# Altium PCB Apollo_Main_Board_1 8.PcbDoc (part 1 of 4)
Units mil, origin at the board's own origin, x right, y up, seen from the top; angles counter-clockwise.
Board outline 984.25 x 629.92 mil, 6 copper layers (Top, Inner Layer 2, Inner Layer 3, Inner Layer 4, Inner Layer 5, Bottom), stack 5.16 mil thick; 125 components, 112 nets, 514 pads, 2007 vias.
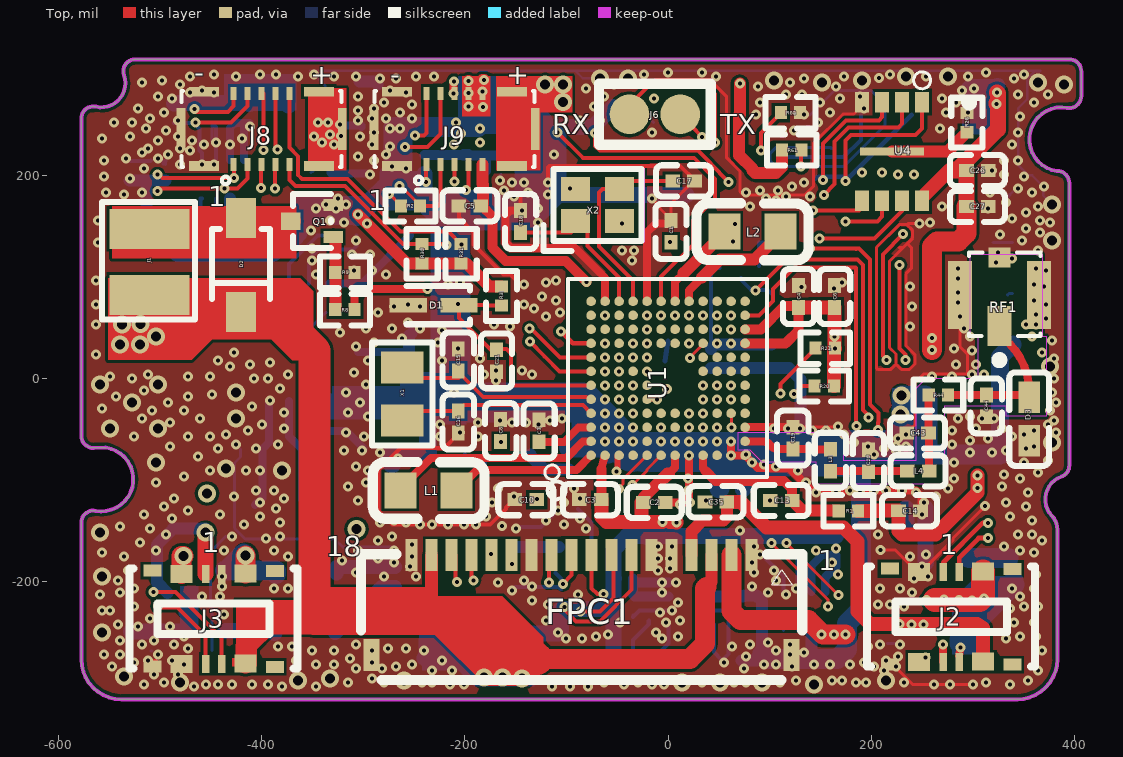
[diagram p0: Top view]
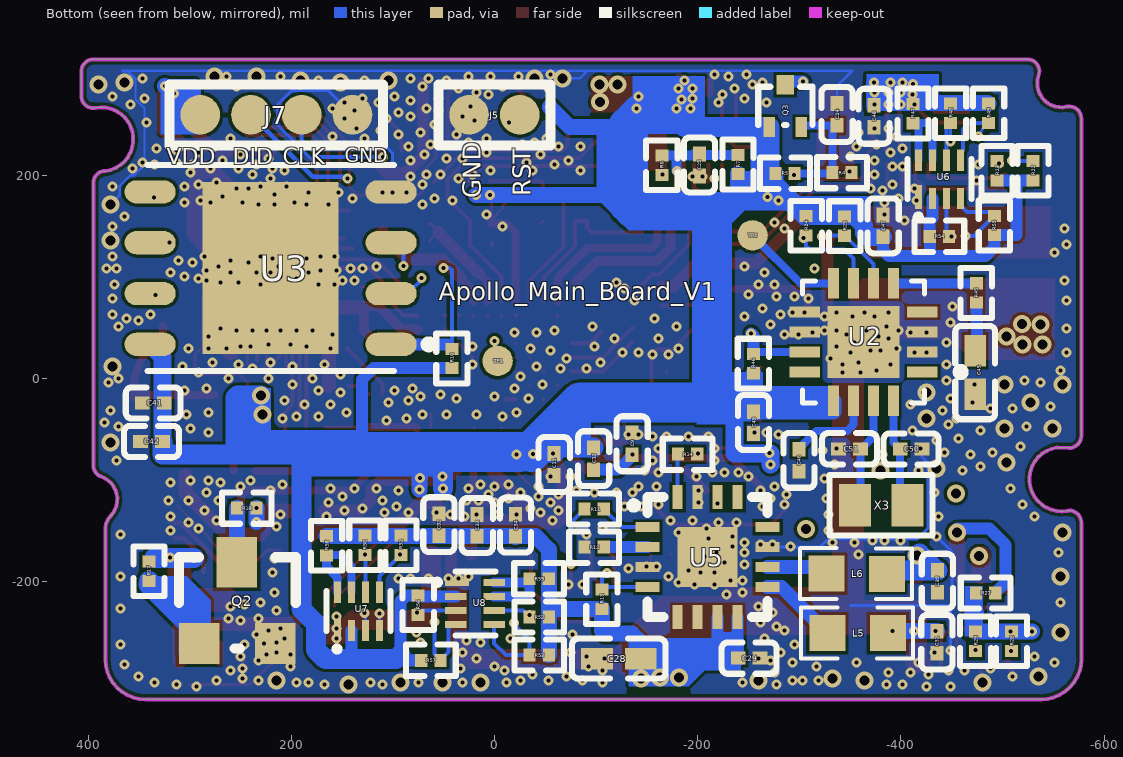
[diagram p1: Bottom view, seen from below]
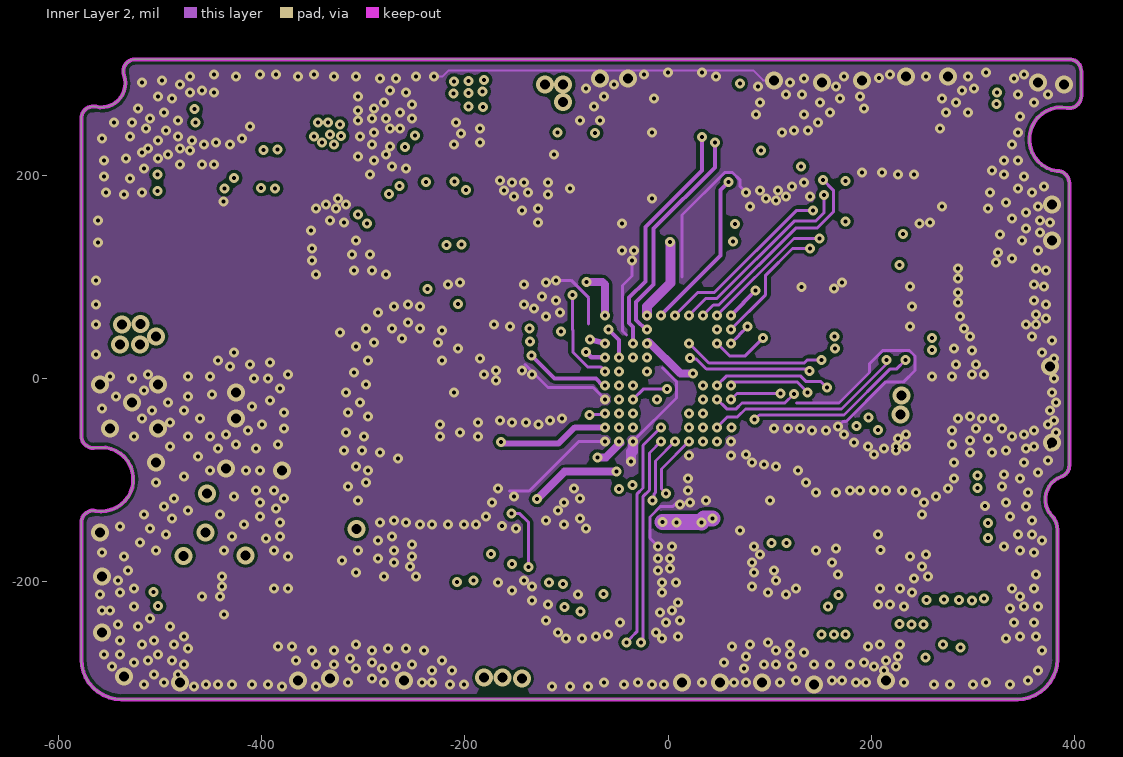
[diagram p2: Inner Layer 2]
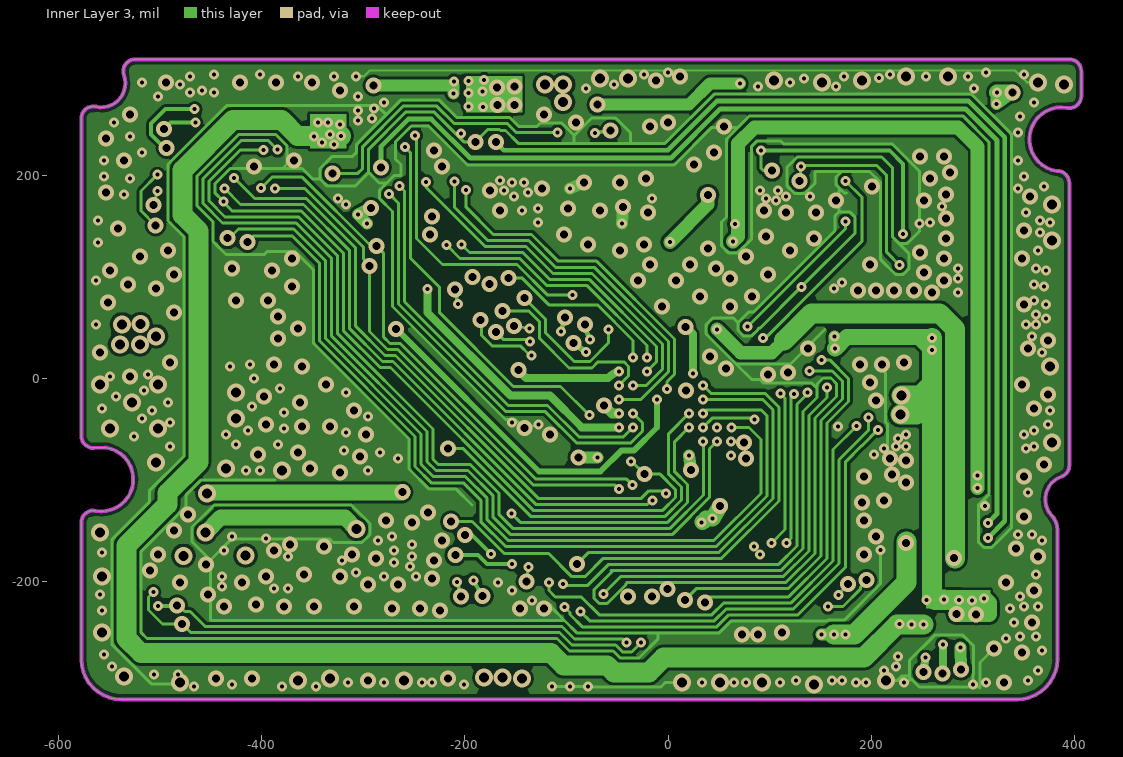
[diagram p3: Inner Layer 3]
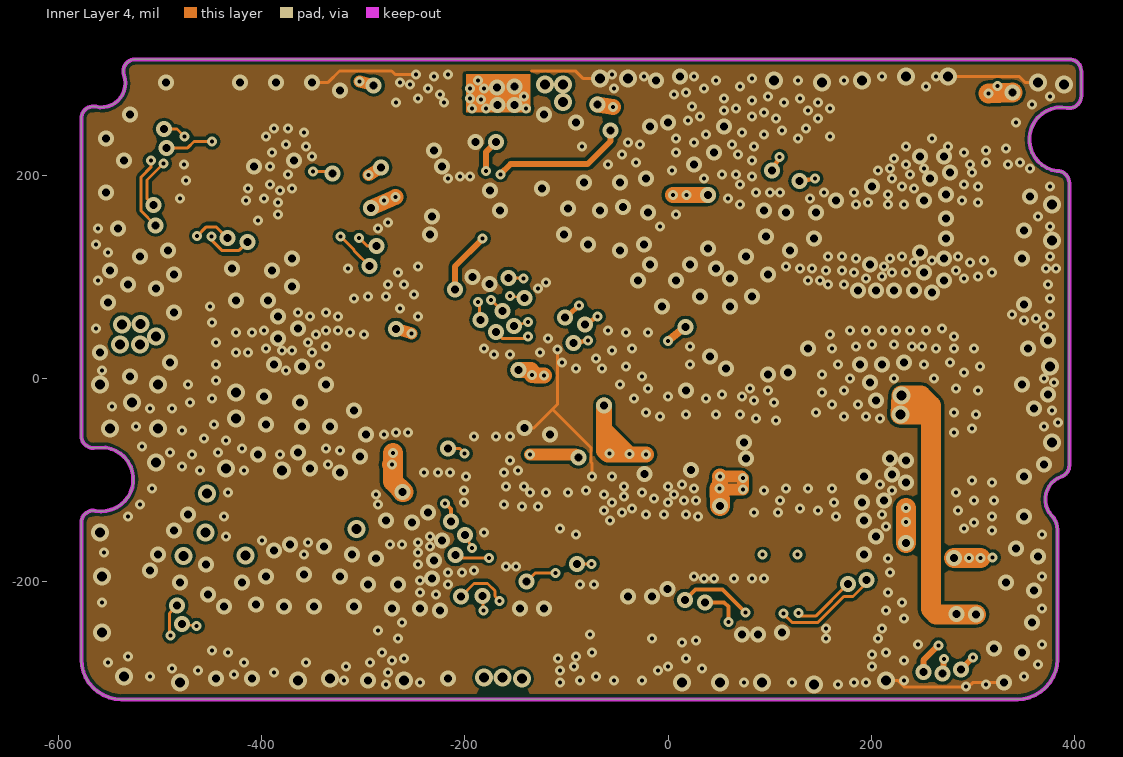
[diagram p4: Inner Layer 4]
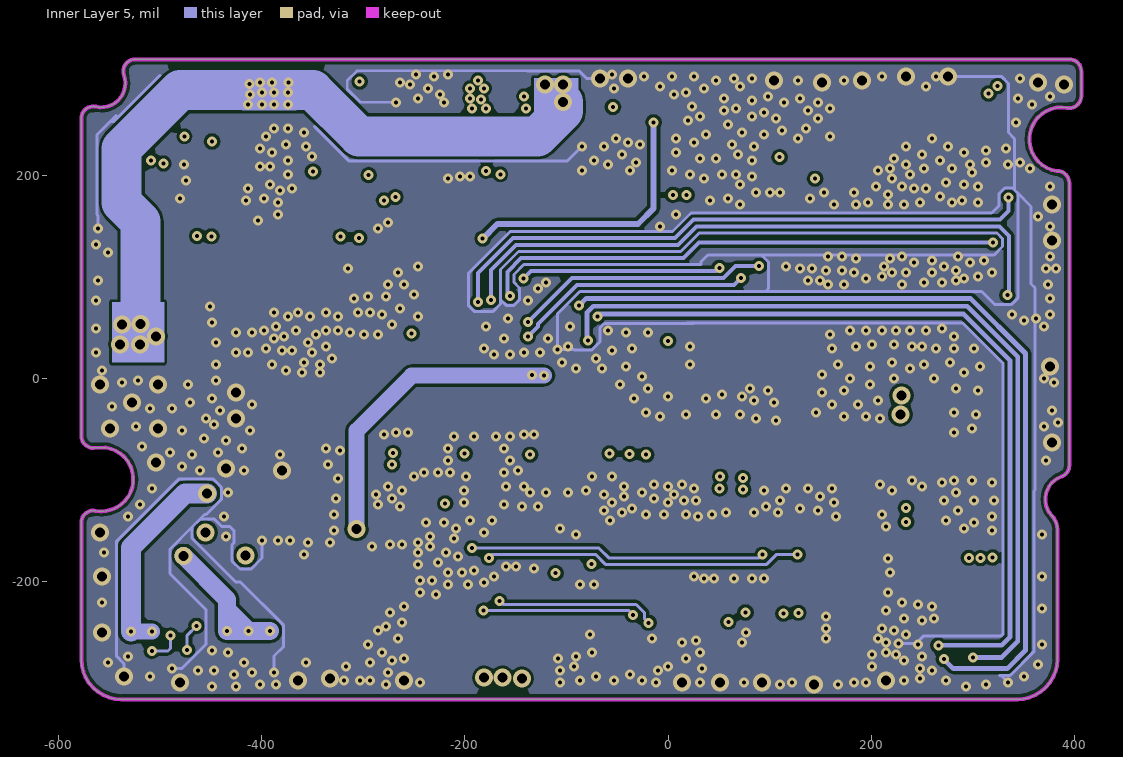
[diagram p5: Inner Layer 5]

## Layer stack, top to bottom
Solder Mask Top: solder mask 0.4, Solder Resist, Dk 3.5
Top: signal copper 1.38
Inner Layer 2: signal copper 0.6
Inner Layer 3: signal copper 0.6
Inner Layer 4: signal copper 0.6
Inner Layer 5: signal copper 0.6
Bottom: signal copper 1.38
Solder Mask Bottom: solder mask 0.4, Solder Resist, Dk 3.5

## Board outline
383.08,-276.6 383.08,-148.84 ccw(c363.4,-148.84) 377.72,-135.34 377.7,-135.32 cw(c394.89,-119.12) 387.05,-96.84 387.02,-96.85 ccw(c383.08,-85.71) 394.89,-85.71 394.89,192.2 ccw(c383.08,192.2) 382.79,204 382.74,204.01 cw(c387.02,235.21) 392.76,266.18 392.74,266.18 ccw(c394.89,277.8) 406.7,277.8 406.7,302.14 ccw(c394.89,302.14) 394.89,313.95 -524.46,313.95 ccw(c-524.46,302.14) -535.59,298.2 -535.6,298.21 cw(c-557.86,290.33) -563.1,267.29 -563.12,267.3 ccw(c-565.73,255.78) -577.55,255.78 -577.55,-56.7 ccw(c-565.74,-56.7) -565.47,-68.51 -553.59,-68.23 cw(c-557.86,-99.44) -563.6,-130.4 -563.58,-130.41 ccw(c-565.73,-142.02) -577.55,-142.02 -577.55,-276.6 ccw(c-538.18,-276.6) -538.18,-315.97 343.71,-315.97 ccw(c343.71,-276.6)

## Design rules (kind name [scope] priority, off if disabled: settings)
Clearance "Clearance - Default - DEFAULT- SMD" [IsVia vs IsSMTPin] p1: gap=0 ignorepadtopadclearanceinfootprint=FALSE
Clearance "Clearance - Default - DEFAULT - Via" [IsVia vs IsVia] p2: gap=0 ignorepadtopadclearanceinfootprint=FALSE
Clearance "Clearance - Default - DEFAULT - Net" [All] p3: gap=2.95 ignorepadtopadclearanceinfootprint=FALSE except(0: Arc-Hole Track-Hole SMDPad-Hole THPad-Hole Via-Hole Fill-Hole Poly-Hole Region-Hole Text-Hole; 10: Text-Text)
ComponentClearance "ComponentClearance - Default - DEFAULT" [All] p1: gap=0 collisioncheckmode=3 verticalgap=10 showdistances=FALSE
FanoutControl Fanout_Small [(CompPinCount < 5)] p3: bgadir=Out bgaviamode=Centered fanoutstyle=Auto fanoutdirection=OutThenIn viagrid=1 // Fanout_Small (Default Rule)
FanoutControl Fanout_SOIC [IsSOIC] p4: bgadir=Out bgaviamode=Centered fanoutstyle=Auto fanoutdirection=Alternating viagrid=1 // Fanout_SOIC (Default Rule)
HoleToHoleClearance "HoleToHoleClearance - Default - DEFAULT" [All] p1: gap=0 allowstackedmicrovias=TRUE
Length "Default Length" [All] p1: maxlimit=50000 minlimit=0
MaxMinImpedance "Default Impedance" [All] p1: minimum=50.00 maximum=150.0
ParallelSegment "Default Parallel Segment Same Layer" [All] p1: limit=1000 gap=200
ParallelSegment "Default Parallel Segment Adjasent" [All] p2: limit=1000 gap=200
PlaneConnect "Default PlaneConnect" [All] p1: planeconnectstyle=Direct reliefexpansion=20 reliefentries=4 reliefconductorwidth=2.95 reliefairgap=10
PolygonConnect "PolygonConnect - Default SMT" [IsSMTPin] p1: connectstyle=Direct reliefconductorwidth=10 reliefentries=4 polygonreliefangle="45 Angle" airgapwidth=10
PolygonConnect "PolygonConnect - Default Pad" [All] p2: connectstyle=Direct reliefconductorwidth=2.95 reliefentries=4 polygonreliefangle="45 Angle" airgapwidth=10
RoutingLayers "RoutingLayers - Default - DEFAULT" [All] p1: top layer_v5=TRUE mid layer 1_v5=TRUE mid layer 2_v5=TRUE mid layer 3_v5=TRUE mid layer 4_v5=TRUE bottom layer_v5=TRUE
RoutingPriority "RoutingPriority - Default - DEFAULT" [All] p1: routingpriority=0
RoutingTopology "Default Routing Topology" [All] p1: topology=Shortest
RoutingVias "RoutingVias - Default - DEFAULT" [All] p1: holewidth=3.94 width=9.84 viastyle="Through Hole" minholewidth=3.94 minwidth=9.84 maxholewidth=3.94 maxwidth=9.84
SMDToCorner "SMDToCorner - Default - DEFAULT" [All] p1: distance=0
SolderMaskExpansion [All] p1: expansion=4 istentingtop=FALSE
Width "Default Width" [All] p1: maxlimit=118.11 minlimit=2.95 preferedwidth=2.95
22 further rules are at their usual default settings.

## Components (designator, comment, footprint, x,y, rotation, side; value= is the part's Value field where it differs from the comment)
C1 "C0201" C0201 2.86,144.59 r270 top
C2 "C0201" C0201 -13.63,-122.16 r180 top
C3 "C0201" C0201 -76.55,-119.51 r0 top
C4 "C0201" C0201 128.44,80.43 r270 top
C5 "C0201" C0201 -195.17,169.73 r0 top
C6 "C0201" C0201 163.88,80.43 r270 top
C7 "C0201" C0201 -126.95,-51.68 r270 top
C8 "C0201" C0201 -164.76,-51.39 r270 top
C9 "C0201" C0201 -135.47,-64.42 r270 bottom
C10 "C0201" C0201 -140.1,-119.44 r0 top
C11 "C0201" C0201 -58.7,-84.87 r90 bottom
C12 "C0201" C0201 -97.57,-79.13 r270 bottom
C13 "C0201" C0201 111.31,-120.3 r180 top
C14 "C0201" C0201 237.57,-130.36 r0 top
C15 "C0201" C0201 -206.55,17.95 r90 top
C16 "C0201" C0201 -206.55,-43.07 r270 top
C17 "C0201" C0201 15.25,194.32 r180 top
C18 "C0201" C0201 -145.14,154.37 r90 top
C19 "C0201" C0201 122.75,-58.89 r90 top
C20 "C0201" C0201 197.15,-81.08 r90 top
C21 "C0201" C0201 -168.93,17.21 r270 top
C24 "C0201" C0201 -337.17,259.73 r90 bottom
C25 "C0201" C0201 -201.62,210.01 r270 bottom
C26 "C0201" C0201 304.37,204.58 r0 top
C27 "C0201" C0201 304.37,169.15 r0 top
C28 "C0402" C0402 -170.28,-250.92 r0 bottom
C29 "C0201" C0201 -250.59,-275.41 r180 bottom
C30 "C0201" C0201 -435.92,-199.77 r90 bottom
C31 "C0201" C0201 -435.4,-259.75 r90 bottom
C32 "C0201" C0201 54.78,-144.11 r90 bottom
C33 "C0201" C0201 17.05,-144.8 r90 bottom
C34 "C0201" C0201 -20.69,-144.57 r90 bottom
C35 "C0201" C0201 46.99,-121.58 r180 top
C41 "C0201" C0201 335.95,-24.26 r0 bottom
C42 "C0201" C0201 337.57,-62.22 r0 bottom
C43 "C0201" C0201 245.57,-53.87 r180 top
C44 "C0201" C0201 313.18,-27.16 r270 top
C45 "C0402" C0402 -448.1,53.63 r270 bottom
C46 "C0201" C0201 -299.6,-80.71 r270 bottom
C47 "C0201" C0201 -382.52,150.03 r270 bottom
C48 "C0201" C0201 -373.47,257.93 r90 bottom
C49 "C0201" C0201 -254.94,-43.6 r270 bottom
C50 "C0201" C0201 -410.05,-69.61 r180 bottom
C51 "C0201" C0201 -349.37,-69.4 r0 bottom
D1 "SOD-523_L1.2-W0.8-LS1.6-RD" SOD-523_L1.2-W0.8-LS1.6-RD -182.52,48.71 r180 top
D2 "SOD-323_L1.8-W1.3-LS2.5-RD" SOD-323_L1.8-W1.3-LS2.5-RD -387.29,45.21 r90 top
D3 "0402" 0402 380.4,-88.1 r90 top
FPC1 "FPC-SMD_18P-P0.50_HDGC_0.5K-HX-18PWB" FPC-SMD_18P-P0.50_HDGC_0.5K-HX-18PWB -317.35,-306.96 r0 top
J1 "MOTOR_PAD" MOTOR_PAD -559.37,56.27 r0 top
J2 "CONN-SMD_4P-P0.40_5050040812" CONN-SMD_4P-P0.40_5050040812 191.93,-288.56 r0 top
J3 "CONN-SMD_4P-P0.40_5050040812" CONN-SMD_4P-P0.40_5050040812 -534.07,-290.56 r0 top
J5 "2PIN_1.27MM" 2PIN_1.27MM -24.93,259.26 r0 bottom
J6 "2PIN_1.27MM" 2PIN_1.27MM 11.98,259.85 r180 top
J7 "4PIN_1.27MM" 4PIN_1.27MM 139.75,259.26 r0 bottom
J8 "CONN-SMD_BK13C06-10DS-2-0.35V-800" CONN-SMD_BK13C06-10DS-2-0.35V-800 -480.59,285.04 r270 top
J9 "CONN-SMD_BK13C06-10DS-2-0.35V-800" CONN-SMD_BK13C06-10DS-2-0.35V-800 -290.59,285.04 r270 top
L1 "C0603" C0603 -235.92,-110.34 r180 top
L2 "C0603" C0603 82.83,144.28 r180 top
L3 "C0201" C0201 159.75,-80.68 r90 top
L4 "C0201" C0201 246.13,-91.11 r180 top
L5 "0603A" 0603A -354.72,-248.51 r90 bottom
L6 "0603A" 0603A -353.59,-190.09 r90 bottom
Q1 "SOT-723_L1.2-W0.8-P0.40-LS1.2-BR" SOT-723_L1.2-W0.8-P0.40-LS1.2-BR -379.48,123.07 r0 top
Q2 "SOT-23" SOT-23 295.61,-261.71 r180 bottom
Q3 "SOT-723_L1.2-W0.8-P0.40-LS1.2-BR" SOT-723_L1.2-W0.8-P0.40-LS1.2-BR -254.49,297.13 r270 bottom
R1 "RES0201" RES0201 149.97,-113.82 r0 top
R2 "RES0201" RES0201 -226.08,153.02 r180 top
R3 "RES0201" RES0201 -180.67,53.53 r90 top
R4 "RES0201" RES0201 -369.46,185.84 r0 bottom
R5 "RES0201" RES0201 -258.43,218.39 r180 bottom
R6 "RES0201" RES0201 -148.03,182.28 r90 bottom
R7 "RES0201" RES0201 -223,182.95 r90 bottom
R8 "RES0201" RES0201 -345.52,84.14 r0 top
R9 "RES0201" RES0201 -345.53,120.94 r0 top
R10 "RES0201" RES0201 25.41,46.98 r270 bottom
R11 "RES0201" RES0201 -125.44,-145.33 r0 bottom
R12 "RES0201" RES0201 -125.44,-182.85 r0 bottom
R13 "RES0201" RES0201 -122.26,-189.96 r270 bottom
R14 "RES0201" RES0201 -217.54,-91.32 r0 bottom
R17 "RES0201" RES0201 323.53,-162.41 r270 bottom
R18 "RES0201" RES0201 271.39,-111.2 r180 bottom
R20 "RES0201" RES0201 126.14,9.01 r0 top
R21 "RES0201" RES0201 127.14,46.26 r0 top
R22 "RES0201" RES0201 -546.66,231.81 r270 bottom
R23 "RES0201" RES0201 -511.22,231.81 r270 bottom
R24 "RES0201" RES0201 -290.12,122.68 r90 bottom
R25 "RES0201" RES0201 -328.01,122.33 r90 bottom
R26 "RES0201" RES0201 310.66,279.14 r270 top
R27 "RES0201" RES0201 -455.87,-194.64 r180 bottom
R28 "RES0201" RES0201 -492.21,-286.33 r90 bottom
R29 "RES0201" RES0201 -456.78,-286.33 r90 bottom
R30 "RES0201" RES0201 -225.52,150.09 r270 top
R31 "RES0201" RES0201 -187.06,150.09 r270 top
R44 "RES0201" RES0201 293.48,-33.11 r180 top
R45 "RES0201" RES0201 -490.8,111.48 r270 bottom
R46 "RES0201" RES0201 -271.42,41.94 r270 bottom
R47 "RES0201" RES0201 -395.22,233.11 r90 bottom
R48 "RES0201" RES0201 -465.5,288.27 r270 bottom
R49 "RES0201" RES0201 -502.9,288.27 r270 bottom
R50 "RES0201" RES0201 110.96,-136.84 r270 bottom
R51 "RES0201" RES0201 75.53,-136.84 r270 bottom
R52 "RES0201" RES0201 -71.55,-251.54 r0 bottom
R53 "RES0201" RES0201 -71.55,-288.94 r0 bottom
R54 "RES0201" RES0201 -410.38,156.38 r180 bottom
R55 "RES0201" RES0201 -475.34,122.92 r90 bottom
R56 "RES0201" RES0201 58.51,-195.81 r270 bottom
R57 "RES0201" RES0201 90.13,-260.96 r180 bottom
R58 "RES0201" RES0201 181.87,-192.25 r90 bottom
R59 "RES0201" RES0201 -16.43,-180.67 r180 bottom
R60 "RES0201" RES0201 93.01,278.06 r0 top
R61 "RES0201" RES0201 94.16,241.26 r0 top
RF1 "IPEX-SMD_4P-L1.8-W1.7-LS2.0" IPEX-SMD_4P-L1.8-W1.7-LS2.0 270.56,8.97 r0 top
TP1 "TESTPOINT" TESTPOINT -3.04,17.08 r90 bottom
TP2 "TESTPOINT" TESTPOINT -253.95,140.65 r90 bottom
U1 "BGA131_0P35_4P7X4P7_AP4BL" BGA131_0P35_4P7X4P7_AP4BL 0,0 r90 top
U2 "QFN50P300X300X90-17N" QFN50P300X300X90-17N -363.17,35.65 r0 bottom
U3 "WSON-8_L6.0-W5.0-P1.27-BL-EP" WSON-8_L6.0-W5.0-P1.27-BL-EP 220.35,108.43 r90 bottom
U4 "PSON50P200X300X50-9N" PSON50P200X300X50-9N 220.51,223.2 r270 top
U5 "TQFN-16_L3.0-W3.0-P0.50-BL-EP1.5" TQFN-16_L3.0-W3.0-P0.50-BL-EP1.5 -135.4,-125.2 r270 bottom
U6 "X2SON-8_L1.4-W1.0-P0.35-BL" X2SON-8_L1.4-W1.0-P0.35-BL -437.94,195.75 r180 bottom
U7 "X2SON-8_L1.4-W1.0-P0.35-BL" X2SON-8_L1.4-W1.0-P0.35-BL 134.09,-229.45 r180 bottom
U8 "X2SON-8_L1.4-W1.0-P0.35-BL" X2SON-8_L1.4-W1.0-P0.35-BL 19.26,-221.59 r270 bottom
X1 "OSC-SMD_2P-L1.6-W1.0" OSC-SMD_2P-L1.6-W1.0 -261.67,-15.51 r270 top
X2 "CRYSTAL-SMD_4P-L1.6-W1.2-BL" CRYSTAL-SMD_4P-L1.6-W1.2-BL -69.36,170.53 r0 top
X3 "OSC-SMD_2P-L1.6-W1.0" OSC-SMD_2P-L1.6-W1.0 -380.53,-124.85 r180 bottom

## Footprints (in the part's own frame and the unit in brackets; to place one, negate y for a bottom-side part, rotate by r counter-clockwise, add the part's x,y. Pads: shape width x height; smd on the part's side, far side on the other; paste and mask are expansions set on the pad)
2PIN_1.27MM [mil]
  round 39 smd: 1(0,0) 2(50,0)
  silkscreen extent -30,-30 80,30
4PIN_1.27MM [mil]
  round 39 smd: 1(0,0) 2(50,0) 3(100,0) 4(150,0)
  silkscreen extent -30,-30 180,30
0402 [mm]
  rect 0.79x0.54 smd: 1(0.674,0.635) 2(1.764,0.635)
  silkscreen extent 0.05,0.14 2.39,1.13
0603A [mm]
  rect 0.9x0.9 smd: 1(-0.058,0.688) 2(-0.058,-0.826)
  silkscreen extent -0.69,-1.46 0.58,1.34
BGA131_0P35_4P7X4P7_AP4BL [mm]
  round 0.24 smd: A1(-1.925,1.925) A2(-1.575,1.925) A3(-1.225,1.925) A4(-0.875,1.925) A5(-0.525,1.925) A6(-0.175,1.925) A7(0.175,1.925) A8(0.525,1.925) A9(0.875,1.925) A10(1.225,1.925) A11(1.575,1.925) A12(1.925,1.925) B1(-1.925,1.575) B2(-1.575,1.575) B3(-1.225,1.575) B4(-0.875,1.575) B5(-0.525,1.575) B6(-0.175,1.575) B7(0.175,1.575) B8(0.525,1.575) B9(0.875,1.575) B10(1.225,1.575) B11(1.575,1.575) B12(1.925,1.575) C1(-1.925,1.225) C2(-1.575,1.225) C3(-1.225,1.225) C4(-0.875,1.225) C5(-0.525,1.225) C6(-0.175,1.225) C7(0.175,1.225) C8(0.525,1.225) C9(0.875,1.225) C10(1.225,1.225) C11(1.575,1.225) C12(1.925,1.225) D1(-1.925,0.875) D2(-1.575,0.875) D3(-1.225,0.875) D4(-0.875,0.875) D5(-0.525,0.875) D6(-0.175,0.875) D7(0.175,0.875) D8(0.525,0.875) D9(0.875,0.875) D10(1.225,0.875) D11(1.575,0.875) D12(1.925,0.875) E1(-1.925,0.525) E2(-1.575,0.525) E3(-1.225,0.525) E4(-0.875,0.525) E5(-0.525,0.525) E6(-0.175,0.525) E7(0.175,0.525) E8(0.525,0.525) E9(0.875,0.525) E10(1.225,0.525) E11(1.575,0.525) E12(1.925,0.525) F1(-1.925,0.175) F2(-1.575,0.175) F3(-1.225,0.175) F4(-0.875,0.175) F9(0.875,0.175) F10(1.225,0.175) F11(1.575,0.175) F12(1.925,0.175) G1(-1.925,-0.175) G2(-1.575,-0.175) G3(-1.225,-0.175) G4(-0.875,-0.175) G9(0.875,-0.175) G10(1.225,-0.175) G11(1.575,-0.175) G12(1.925,-0.175) H1(-1.925,-0.525) H2(-1.575,-0.525) H3(-1.225,-0.525) H4(-0.875,-0.525) H9(0.875,-0.525) H10(1.225,-0.525) H11(1.575,-0.525) H12(1.925,-0.525) J1(-1.925,-0.875) J2(-1.575,-0.875) J3(-1.225,-0.875) J4(-0.875,-0.875) J5(-0.525,-0.875) J6(-0.175,-0.875) J7(0.175,-0.875) J8(0.525,-0.875) J9(0.875,-0.875) J10(1.225,-0.875) J11(1.575,-0.875) J12(1.925,-0.875) K1(-1.925,-1.225) K2(-1.575,-1.225) K3(-1.225,-1.225) K4(-0.875,-1.225) K5(-0.525,-1.225) K6(-0.175,-1.225) K7(0.175,-1.225) K8(0.525,-1.225) K9(0.875,-1.225) K10(1.225,-1.225) K11(1.575,-1.225) K12(1.925,-1.225) L1(-1.925,-1.575) L2(-1.575,-1.575) L4(-0.875,-1.575) L5(-0.525,-1.575) L6(-0.175,-1.575) L7(0.175,-1.575) L8(0.525,-1.575) L9(0.875,-1.575) L10(1.225,-1.575) L11(1.575,-1.575) L12(1.925,-1.575) M1(-1.925,-1.925) M2(-1.575,-1.925) M3(-1.225,-1.925) M4(-0.875,-1.925) M5(-0.525,-1.925) M6(-0.175,-1.925) M7(0.175,-1.925) M8(0.525,-1.925) M9(0.875,-1.925) M10(1.225,-1.925) M11(1.575,-1.925) M12(1.925,-1.925)
  silkscreen extent -3.03,-2.47 2.49,3.01
C0201 [mil]
  rect 14.51x12.76 smd paste-6.75 mask+2: 1(-10.8,0) 2(10.8,0)
  silkscreen extent -27,-15 27,15
C0402 [mm]
  rect 0.79x0.54 smd: 1(0.674,0.635) 2(1.764,0.635)
  silkscreen extent 0.05,0.14 2.39,1.13
C0603 [mm]
  rect 0.8x0.9 smd: 1(-0.7,0) 2(0.7,0)
  silkscreen extent -1.41,-0.71 1.39,0.72
CONN-SMD_4P-P0.40_5050040812 [mm]
  rect 0.45x0.3 smd mask+0.05: 0(0.672,0.17) 0_1(0.672,2.572) 0_2(3.732,2.565) 0_3(3.732,0.168)
  rect 0.19x0.45 smd mask+0.05: 1(2.002,2.484) 2(2.402,2.485) 3(2.002,0.24) 4(2.402,0.238)
  rect 0.55x0.45 smd mask+0.05: 5(1.402,2.492) 6(3.002,2.497) 7(1.402,0.24) 8(3.002,0.248)
  silkscreen extent 0.1,0.12 4.3,2.62
CONN-SMD_BK13C06-10DS-2-0.35V-800 [mm]
  rect 0.325x0.15 smd mask+0.051: 1(1.89,1.344) 2(1.89,1.694) 3(1.89,2.044) 4(1.89,2.394) 5(1.89,2.744) 6(0.116,2.744) 7(0.116,2.394) 8(0.116,2.044) 9(0.116,1.694) 10(0.116,1.344)
  rect 0.24x0.75 smd mask+0.051: 11(0.074,0.609) 12(1.933,0.609) 13(1.933,3.479) 14(0.074,3.479)
  rect 1.04x0.215 smd mask+0.051: 15(1.007,0.029) 16(1.007,4.059)
  silkscreen extent 0.05,0.04 2.39,4.04
CRYSTAL-SMD_4P-L1.6-W1.2-BL [mm]
  rect 0.73x0.6 smd mask+0.05: 1(-0.55,-0.4) 2(0.55,-0.4) 3(0.55,0.4) 4(-0.55,0.4)
  silkscreen extent -1.35,-1.15 1.1,0.9
FPC-SMD_18P-P0.50_HDGC_0.5K-HX-18PWB [mm]
  rect 0.3x0.8 smd mask+0.05: 1(10.148,3.377) 2(9.648,3.377) 3(9.148,3.377) 4(8.648,3.377) 5(8.148,3.377) 6(7.648,3.377) 7(7.148,3.377) 8(6.648,3.377) 9(6.148,3.377) 10(5.648,3.377) 11(5.148,3.377) 12(4.648,3.377) 13(4.148,3.377) 14(3.648,3.377) 15(3.148,3.377) 16(2.648,3.377) 17(2.148,3.377) 18(1.648,3.377)
  rect 0.4x0.8 smd mask+0.05: 19(0.648,0.877) 20(11.148,0.877)
  silkscreen extent 0.38,0.25 11.41,3.4
IPEX-SMD_4P-L1.8-W1.7-LS2.0 [mm]
  rect 0.6x1 smd mask+0.05: 1(1.417,1.085)
  rect 0.6x1.7 smd mask+0.05: 2(2.406,1.86) 4(0.427,1.86)
  rect 0.55x0.5 smd mask+0.05: 3(1.417,2.789)
  silkscreen extent 0.65,0.13 2.43,2.92
MOTOR_PAD [mm]
  rect 2x1 smd mask+0.05: 1(1.237,0.655) 2(1.238,2.305)
  silkscreen extent 0.06,0.04 2.38,2.98
OSC-SMD_2P-L1.6-W1.0 [mm]
  rect 0.8x1.06 smd: 1(-0.66,0) 2(0.66,0)
  silkscreen extent -1.29,-0.76 1.29,0.76
PSON50P200X300X50-9N [mm]
  rect 0.52x0.35 smd: 1(-1.23,0.75) 2(-1.23,0.25) 3(-1.23,-0.25) 4(-1.23,-0.75) 5(1.23,-0.75) 6(1.23,-0.25) 7(1.23,0.25) 8(1.23,0.75)
  rect 0.2x1.6 smd: 9(0,0)
  silkscreen extent -1.33,1.83 -1.13,2.02
QFN50P300X300X90-17N [mm]
  rect 0.76x0.27 smd: 1(-1.47,0.75) 2(-1.47,0.25) 3(-1.47,-0.25) 4(-1.47,-0.75) 9(1.47,-0.75) 10(1.47,-0.25) 11(1.47,0.25) 12(1.47,0.75)
  rect 0.27x0.76 smd: 5(-0.75,-1.47) 6(-0.25,-1.47) 7(0.25,-1.47) 8(0.75,-1.47) 13(0.75,1.47) 14(0.25,1.47) 15(-0.25,1.47) 16(-0.75,1.47)
  rect 1.8x1.8 smd paste-0.33: 17(0,0)
  silkscreen extent -2.53,-1.53 1.53,1.53
RES0201 [mil]
  rect 11.93x12.76 smd paste-5.88 mask+2: 1(17.97,-16.62) 2(36.99,-16.62)
  silkscreen extent 3,-32 52,-1
SOD-323_L1.8-W1.3-LS2.5-RD [mm]
  rect 1x0.75 smd mask+0.051: 1(0.513,0.841) 2(2.858,0.841)
  silkscreen extent 0.83,0.11 2.59,1.57
SOD-523_L1.2-W0.8-LS1.6-RD [mm]
  rect 0.93x0.36 smd mask+0.051: 1(0.592,-0.591) 2(1.862,-0.591)
  silkscreen extent 0.31,-1.07 1.9,-0.11
SOT-23 [mil]
  rect 40x40 smd: 1(4.88,0.63) 2(79.88,0.63)
  rect 40x50 smd: 3(41.88,80.63)
  silkscreen extent -15,-4 100,86
SOT-723_L1.2-W0.8-P0.40-LS1.2-BR [mil]
  rect 19.25x11.57 smd mask+2: 1(49.78,15.92) 2(49.78,47.41)
  rect 19.25x17.09 smd mask+2: 3(8.08,31.66)
  silkscreen extent 10,5 48,58
TESTPOINT [mil]
  round 30 smd: 1(0,0)
TQFN-16_L3.0-W3.0-P0.50-BL-EP1.5 [mm]
  rect 0.25x0.6 smd paste-0.287 mask+0.051: 1(0.54,0.386) 2(1.04,0.386) 3(1.54,0.386) 4(2.04,0.386) 9(2.039,3.385) 10(1.539,3.385) 11(1.039,3.385) 12(0.54,3.386)
  rect 0.6x0.25 smd paste-0.287 mask+0.051: 5(2.789,1.137) 6(2.789,1.638) 7(2.789,2.137) 8(2.789,2.638) 13(-0.211,2.638) 14(-0.211,2.137) 15(-0.211,1.638) 16(-0.211,1.137)
  rrect0% 1.5x1.5 smd paste-0.737 mask+0.051: 17(1.289,1.885)
  silkscreen extent -0.21,-0.01 2.79,3.39
WSON-8_L6.0-W5.0-P1.27-BL-EP [mm]
  oval 0.581x1.276 smd: 1(-1.905,-3.013) 2(-0.635,-3.013) 3(0.635,-3.013) 4(1.905,-3.013) 5(1.905,3.013) 6(0.635,3.013) 7(-0.635,3.013) 8(-1.905,3.013)
  rect 4.3x3.4 smd: 9(0,0)
  silkscreen extent -2.58,-4.05 2.58,3.08
X2SON-8_L1.4-W1.0-P0.35-BL [mm]
  rect 0.175x0.6 smd: 1(-0.525,-0.445)
  rect 0.175x0.53 smd: 2(-0.175,-0.48) 3(0.175,-0.48) 4(0.525,-0.48) 5(0.525,0.48) 6(0.175,0.48) 7(-0.175,0.48) 8(-0.525,0.48)
  silkscreen extent -0.8,-1 0.8,0.52

## Via types
v1: diameter 9.84, hole 3.94, Inner Layer 4 to Bottom, 571 vias
v2: diameter 9.84, hole 3.94, Top to Inner Layer 2, 540 vias
v3: diameter 9.84, hole 3.94, Top to Inner Layer 3, 349 vias
v4: diameter 15.75, hole 7.87, Inner Layer 3 to Inner Layer 4, 268 vias
v5: diameter 9.84, hole 3.94, Inner Layer 5 to Bottom, 178 vias
v6: diameter 17.72, hole 9.84, Top to Bottom, 54 vias
v7: diameter 9.84, hole 3.94, Inner Layer 2 to Inner Layer 3, 25 vias
v8: diameter 9.84, hole 3.94, Inner Layer 4 to Inner Layer 5, 22 vias

## Nets (pads, with @x,y where several pads share a name; then routed paths per layer and width w, separated by ;. In a path a pad name is that pad's centre, name@x,y a point inside that pad or via, vN(x,y) a via of type N, cw(c..) or ccw(c..) an arc to the next point about the centre after c; other vN are vias at no path point)
A_LCD_LEDK: FPC1.2 R18.2 | length 373.3
  Top w2.95: v3(151.05,-252.35) v3@152.48,-252.35
  Top w19.68: FPC1.2@62.49,-174.01 62.49,-229.23 71.29,-238.03 138.16,-238.03 152.48,-252.35 v3(163.11,-252.35) v3(174.48,-252.35)
  Inner Layer 3 w2.95: v4(234.22,-161.92) 234.22,-161.02 v4@234.4,-160.84
  Inner Layer 3 w11.81: v3(151.05,-252.35) v3(163.11,-252.35)
  Inner Layer 3 w19.68: v3(163.11,-252.35) 183.23,-252.35 234.4,-201.18 v4@234.4,-160.84
  Inner Layer 4 w19.68: v1(234.15,-141.46) v1@234.22,-141.39 ; v4(234.22,-161.92) v1@234.22,-141.39 ; v1(234.22,-127.63) v1@234.22,-141.39
  Bottom w2.95: v1(234.22,-127.63) R18.2@234.41,-127.82 v1(234.22,-127.63)
  Bottom w15.75: v1(234.15,-141.46) 234.41,-141.46 234.41,-128.23 v1(234.22,-127.63)
A_LCD_TP_SCL: FPC1.13 R50.2 U7.6 | length 453.1
  Top w2.95: FPC1.13@-154.04,-174.01 -153.68,-174.37 v3(-153.68,-182.54)
  Inner Layer 3 w3.94: v4(-209.42,-174.1) -187.19,-174.1 -178.43,-182.86 -165.48,-182.86 -165.41,-182.93 -153.68,-182.93 v3(-153.68,-182.54)
  Inner Layer 4 w2.95: v4(-209.42,-174.1) -206.81,-176.71 v8(-176.52,-176.71)
  Inner Layer 5 w2.95: v8(-176.52,-176.71) -173.03,-173.22 -71.57,-173.22 -61.76,-183.03 97.05,-183.03 106.41,-173.67 v1(127.43,-173.67)
  Bottom w2.95: v1(127.43,-173.67) R50.2@127.58,-173.83 v1(127.43,-173.67)
  Bottom w3.94: U7.6@127.2,-210.56 127.2,-174.21 R50.2@127.58,-173.83
A_LCD_TP_SDA: FPC1.14 R51.2 U7.5 | length 387.7
  Top w2.95: v3(-174.15,-173.02) -173.73,-173.44 FPC1.14@-173.73,-174.01
  Inner Layer 3 w3.94: v4(-199.75,-154.2) -192.97,-154.2 v3(-174.15,-173.02)
  Inner Layer 4 w2.95: v4(-199.75,-154.2) v8(-192.95,-167.22)
  Inner Layer 5 w2.95: v8(-192.95,-167.22) -67.93,-167.22 -58.04,-177.11 89.7,-177.11 v1(93.14,-173.67)
  Bottom w2.95: R51.2@92.15,-173.83 92.3,-173.67 v1(93.14,-173.67)
  Bottom w3.94: R51.2@92.15,-173.83 92.56,-173.83 113.42,-194.68 U7.5@113.42,-210.56
A_LCD_TP_TINT: FPC1.16 R53.2 U8.5 | length 361
  Top w3.94: FPC1.16@-213.1,-174.01 -209.43,-174.01 -209.43,-200.7 v3(-207.59,-200.7)
  Inner Layer 3 w3.94: v3(-207.59,-200.7) v4(-203.73,-214.7)
  Inner Layer 4 w2.95: v4(-203.73,-214.7) -191.01,-201.98 -177.7,-201.98 -170.48,-209.2 -170.48,-214.5 -165.96,-219.03 v8(-166.17,-219.24)
  Inner Layer 5 w2.95: v8(-166.17,-219.24) -162.67,-222.74 -31.37,-222.74 -23.12,-230.99 -23.12,-236.83 v5(-19.33,-240.62)
  Bottom w3.94: v5(-19.33,-240.62) -19.33,-238.83 -18.68,-238.18 -18.68,-241.81 -34.56,-257.69 R53.2@-34.56,-272.32 -11.13,-272.32 0.37,-260.82 U8.5@0.37,-242.26
A_LCD_TP_TRST: FPC1.15 R52.2 U8.6 | length 246.2
  Top w3.94: FPC1.15@-193.42,-174.01 -193.42,-197.11 v3(-191.68,-198.85)
  Inner Layer 3 w3.94: v3(-191.68,-198.85) v4(-182.79,-214.29)
  Inner Layer 4 w2.95: v4(-182.79,-214.29) v8(-181.52,-228.65)
  Inner Layer 5 w2.95: v8(-181.52,-228.65) -38.68,-228.65 v5(-34.56,-232.77)
  Bottom w2.95: R52.2@-34.56,-234.92 v5(-34.56,-232.77)
  Bottom w3.94: R52.2@-34.56,-234.92 -28.12,-228.48 U8.6@0.37,-228.48
BUTTON1: R4.1 U1.F12 | length 611.1
  Top w3.94: v3(-108.77,242.15) -83.69,217.07 25.28,217.07 46.2,196.15 46.2,177.03 24.38,155.21 24.38,131.26 -6.89,99.99 U1.F12@-6.89,75.79
  Inner Layer 3 w2.95: v4(-330.31,201.33) -305.85,201.33 -300.67,206.51 -300.67,227.97 -260.83,267.8 -227.68,267.8 -210.56,250.68 -158.32,250.68 -149.79,242.15 v3(-108.77,242.15)
  Inner Layer 4 w2.95: v1(-349.49,203.48) -332.46,203.48 v4(-330.31,201.33)
  Bottom w2.95: R4.1@-351.49,202.46 -350.48,203.48 v1(-349.49,203.48)
BUTTON1_P: C24.1 J2.1 Q3.2 R4.2 R5.2 | length 1275.6
  Top w4.72: J2.1@270.74,-190.77 270.74,-181.3 309.68,-142.35 v3(314.88,-142.35)
  Inner Layer 3 w4.72: v4(-282.46,207.63) -282.46,228.22 -255.59,255.09 -232.93,255.09 -194.68,216.84 3.08,216.84 51.36,265.12 292.72,265.12 323.73,234.11 323.73,-133.5 v3(314.88,-142.35)
  Inner Layer 4 w11.81: v1(-294.69,199.95) v4(-282.46,207.63)
  Bottom w2.95: R5.2@-295.42,201.77 -294.69,201.04 v1(-294.69,199.95)
  Bottom w7.87: Q3.2@-301.9,247.35 -301.9,248.93 C24.1@-337.17,248.93 -332.47,244.23 R4.2@-332.47,202.46 -331.77,201.77 R5.2@-295.42,201.77
BUTTON2: R6.1 U1.F11 | length 467.6
  Top w3.94: v3(-71.82,241.52) -71.82,228.77 -67.05,224 29.48,224 41.69,211.79 41.69,211.18 v2(59.59,193.28) ; v2(-6.89,62.01) U1.F11@-6.75,61.87
  Inner Layer 2 w3.94: v2(-6.89,62.01) -6.96,62.08 51.63,120.67 51.63,185.32 v2(59.59,193.28)
  Inner Layer 3 w3.94: v3(-71.82,241.52) v4(-56.68,243.88)
  Inner Layer 4 w5.91: v1(-165.18,200.78) -155.04,210.92 -79.2,210.92 -56.68,233.44 v4(-56.68,243.88)
  Bottom w2.95: R6.1@-164.65,200.25 v1(-165.18,200.78) R6.1@-164.65,200.25
BUTTON2_M: C25.1 J2.2 R6.2 R7.2 | length 1122.2
  Top w4.72: J2.2@286.48,-190.73 286.48,-176.41 305.65,-157.24 v3(314.63,-157.24)
  Inner Layer 3 w4.72: v4(-169.56,232.43) -161.66,224.53 -0.17,224.53 48.1,272.8 295.9,272.8 331.41,237.29 331.41,-140.46 v3(314.63,-157.24)
  Inner Layer 4 w5.91: v1(-179.44,204.11) -179.44,222.55 v4(-169.56,232.43)
  Bottom w2.95: v1@-179.64,204.31 v1(-179.44,204.11) ; R6.2@-164.87,219.07 R6.2@-164.65,219.27
  Bottom w9.84: R7.2@-239.62,219.94 -202.47,219.94 -201.8,219.27 -194.72,219.27 ; C25.1@-201.62,220.81 -196.26,220.81 -194.72,219.27 ; v1(-179.44,204.11) -179,204.11 -179,219.27 ; R6.2@-164.65,219.27 -179,219.27 ; -194.72,219.27 -179,219.27
ENS1_SUP_EN: J9.4 U1.D5 | length 392.4
  Top w3.94: v3(-199.15,185.37) -196.33,188.19 J9.4@-196.33,210.63
  Inner Layer 2 w2.95: v2(-34.45,-20.67) -24.48,-10.7 v3(-1.1,-10.7)
  Inner Layer 3 w2.95: v3(-199.15,185.37) -199.15,168.71 -172.03,141.59 -134.5,141.59 -108.18,115.27 -70.29,115.27 6.4,38.58 6.4,4.02 -1.1,-3.48 v3(-1.1,-10.7)
ES_RX: J8.9 R49.2 U6.5 | length 203.8
  Top w3.94: v3(-465.31,251.85) -430.17,251.85 -413.89,268.13 J8.9@-413.89,280.46
  Inner Layer 3 w3.94: v4(-496.12,245.46) -489.73,251.85 v3(-465.31,251.85)
  Inner Layer 4 w2.95: v4(-496.12,245.46) -483.41,245.46 v1(-476.14,238.19)
  Bottom w2.95: R49.2@-486.28,251.28 -484.11,251.28 v1(-476.14,238.19)
  Bottom w3.94: R49.2@-486.28,251.28 -467.04,251.28 -461.2,245.44 -461.2,224.22 -458.61,221.63 U6.5@-458.61,214.64
ES_TX: J8.10 R48.2 U6.6 | length 240.9
  Top w3.94: v3(-466.03,265.01) -466.03,262.42 -465.82,262.21 -433.39,262.21 -427.67,267.93 J8.10@-427.67,280.46
  Inner Layer 3 w3.94: v4(-493.66,226.86) -494.64,225.88 -508.92,240.16 -508.92,250.76 -494.67,265.01 v3(-466.03,265.01)
  Inner Layer 4 w2.95: v4(-493.66,226.86) -472.86,226.86 -466.69,233.03 v1(-448.84,233.03)
  Bottom w2.95: R48.2@-448.88,251.28 -448.88,241.65 -448.84,241.61 v1(-448.84,233.03)
  Bottom w3.94: R48.2@-448.88,251.28 -444.83,247.24 U6.6@-444.83,214.64
FG_GPOUT: J9.10 U1.B7 | length 425.7
  Top w3.94: v3(-248.92,238.93) -240.16,238.93 -237.67,241.42 J9.10@-237.67,280.46
  Inner Layer 2 w2.95: v7(-93.95,81.78) -93.95,47.43 -93.49,46.97 -93.49,25.4 -79.38,11.29 -66.41,11.29 v2(-62.01,6.89)
  Inner Layer 3 w2.95: v3(-248.92,238.93) -247.72,237.73 -247.72,137.65 -222.11,112.04 -148.8,112.04 -118.54,81.78 v7(-93.95,81.78)
GH3020_INT: J8.8 U1.J2 | length 904.1
  Top w3.94: J8.8@-400.11,280.46 -398.43,280.46 v3(-398.43,224.91)
  Inner Layer 3 w2.95: v3(-398.43,224.91) -420.93,224.91 -451.68,194.16 -451.68,174.4 -436.06,158.79 -363.49,158.79 -325.18,120.48 -325.18,43.96 -231.36,-49.86 -231.36,-79.58 -226.15,-84.79 -194.63,-84.79 -166.62,-112.8 -166.62,-133.86 -152.8,-147.68 2.02,-147.68 34.89,-114.81 34.89,-62.45 v3(34.45,-62.01)
GH3020_RES: J8.7 U1.K2 | length 954.6
  Top w2.95: U1.K2@48.09,-61.87 v3(48.23,-62.01)
  Top w3.94: J8.7@-386.33,280.46 -386.33,226.81 v3(-384.53,225.01)
  Inner Layer 3 w2.95: v3(-384.53,225.01) -393.79,234.27 -419.92,234.27 -457.58,196.61 -457.58,171.96 -438.51,152.88 -366.06,152.88 -331.08,117.9 -331.08,41.51 -237.27,-52.3 -237.27,-82.03 -228.53,-90.76 -197.01,-90.76 -172.53,-115.25 -172.53,-136.31 -155.25,-153.59 4.46,-153.59 40.84,-117.21 40.84,-69.4 v3(48.23,-62.01)